# Altium PCB MCU_Board.PcbDoc
Units mm, origin at the board's own origin, x right, y up, seen from the top; angles counter-clockwise.
Board outline 100 x 100 mm, 2 copper layers (Top Layer, Bottom Layer); 25 components, 26 nets, 142 pads, 0 vias.
Unrouted connection lines stored in the file: 82.
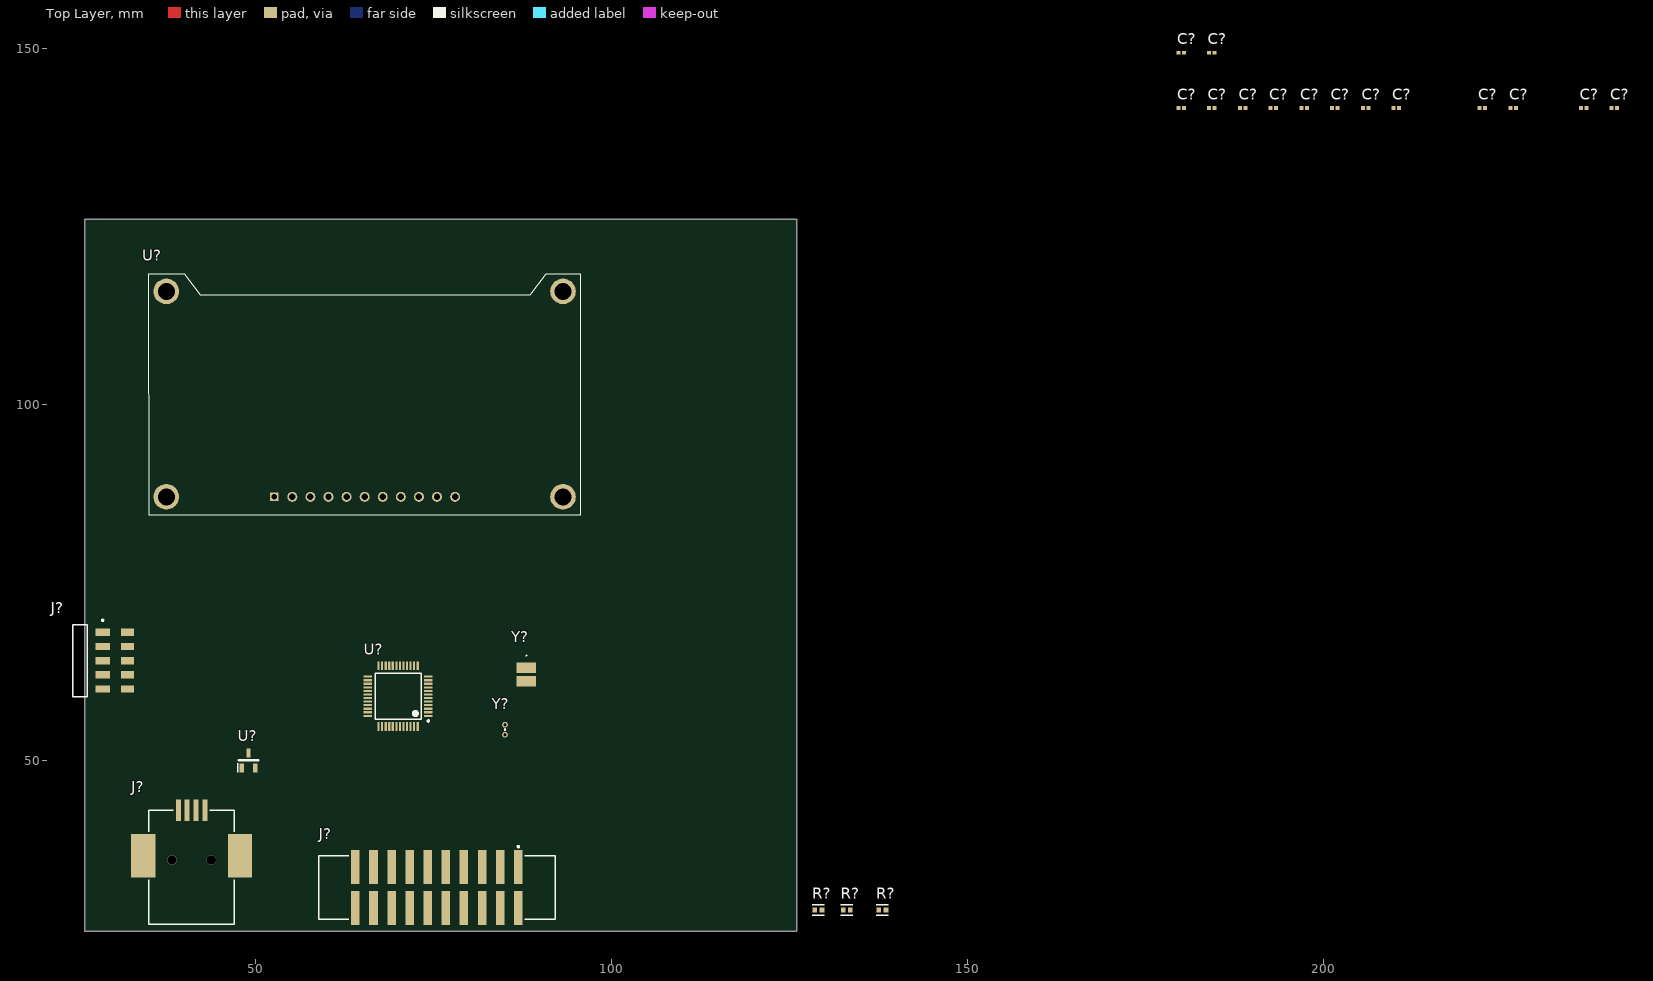
[diagram p0: Top Layer view]
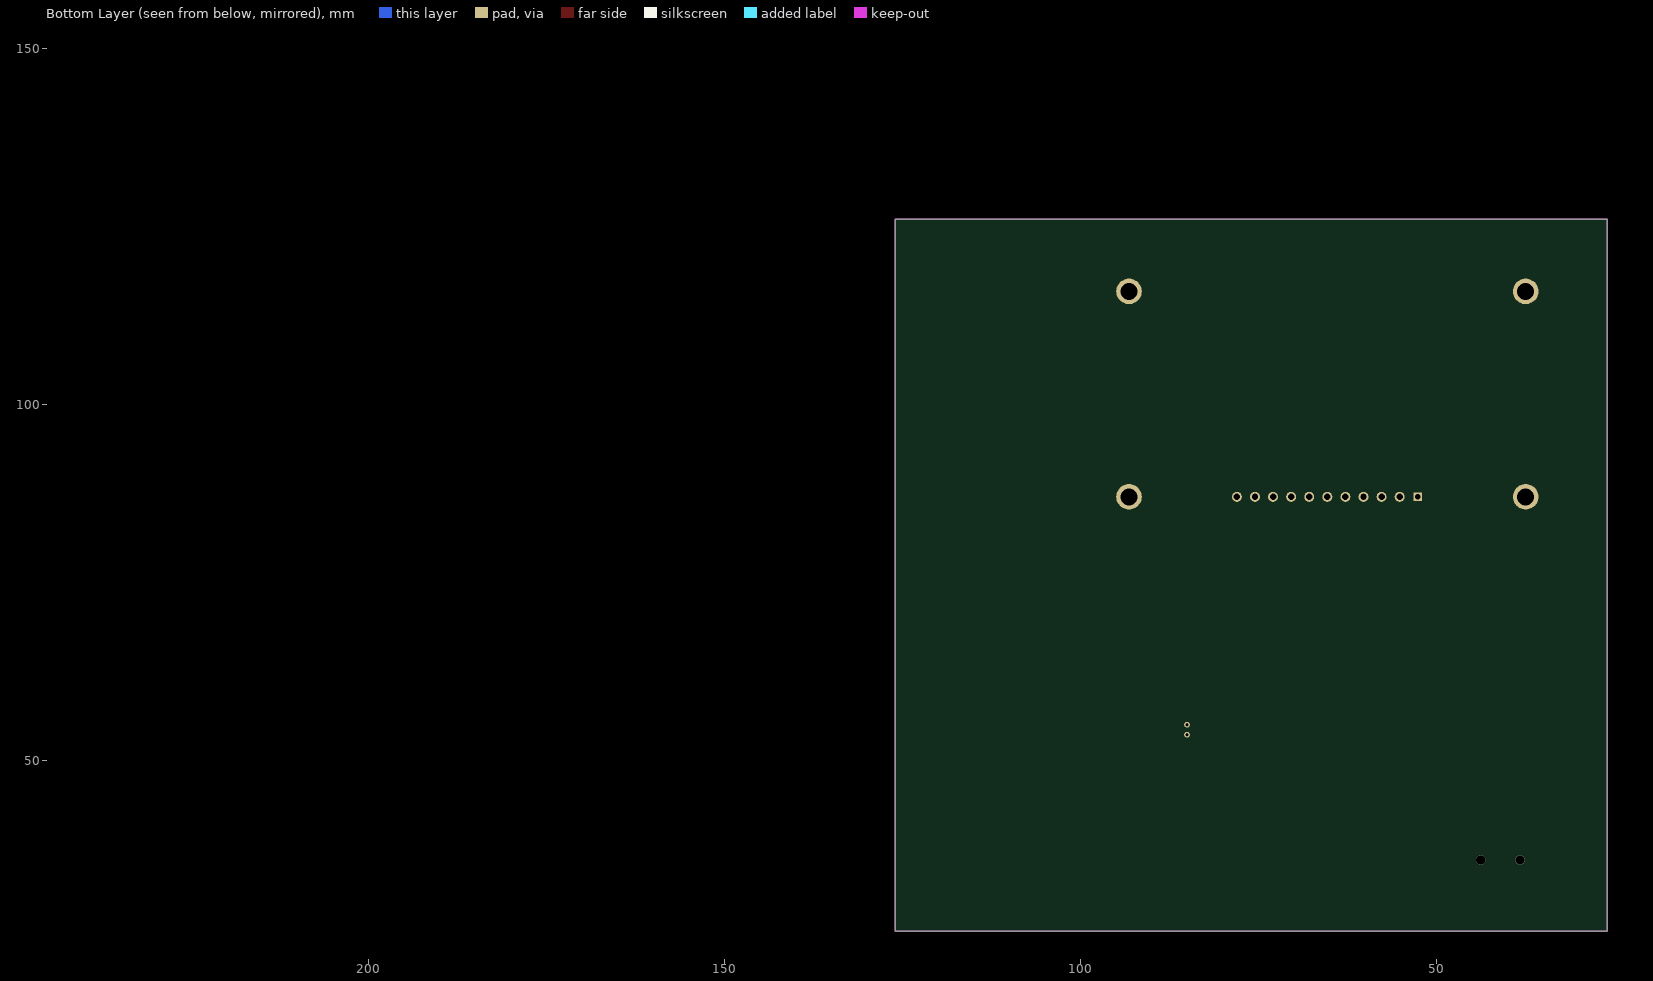
[diagram p1: Bottom Layer view, seen from below]

## Layer stack, top to bottom
Top Solder: solder mask 0.0102, Solder Resist, Dk 3.5
Top Layer: signal copper 0.0356
Dielectric 1: dielectric 0.32, FR-4, Dk 4.8
Bottom Layer: signal copper 0.0356
Bottom Solder: solder mask 0.0102, Solder Resist, Dk 3.5

## Board outline
26,26 126,26 126,126 26,126

## Design rules (kind name [scope] priority, off if disabled: settings)
Clearance [All] p1: gap=0.254 ignorepadtopadclearanceinfootprint=FALSE
DiffPairsRouting [All] p1: maxlimit=0.254 minlimit=0.254 mostfreqgap=0.254 toplayer_minwidth=0.381 toplayer_maxwidth=0.381 toplayer_prefwidth=0.381 bottomlayer_minwidth=0.381 bottomlayer_maxwidth=0.381 bottomlayer_prefwidth=0.381 maxuncoupledlength=12.7
PolygonConnect [All] p1: connectstyle=Relief reliefconductorwidth=0.254 reliefentries=4 polygonreliefangle="90 Angle" airgapwidth=0.254
RoutingVias [All] p1: holewidth=0.711 width=1.27 viastyle="Through Hole" minholewidth=0.711 minwidth=1.27 maxholewidth=0.711 maxwidth=1.27
SolderMaskExpansion [All] p1: expansion=0.102 istentingtop=FALSE
SupplyNets "Schematic Supply Nets_2" [InNet('GND')] p1: voltage=0.000
SupplyNets "Schematic Supply Nets_1" [InNet('VDD')] p2: voltage=0.000
SupplyNets "Schematic Supply Nets" [InNet('VDDA')] p3: voltage=0.000
Width [All] p1: maxlimit=0.254 minlimit=0.254 preferedwidth=0.254
29 further rules are at their usual default settings.

## Classes and differential pairs
component class PowerSupply: C? U?
component class MCU: C? U? Y?
component class LCD_Display: U?
component class Connectors: J? R?
differential pair USB: +USB_P -USB_N
differential pair OSC: +OSC_P -OSC_N
differential pair OSC32: +OSC32_P -OSC32_N

## Components (designator, comment, footprint, x,y, rotation, side; value= is the part's Value field where it differs from the comment)
C? "10uF" CAP_0402 197.231,141.605 r0 top
C? "100nF" CAP_0402 188.595,141.605 r0 top
C? "10nF" CAP_0402 205.867,141.605 r0 top
C? "10pF" CAP_0402 226.568,141.605 r0 top
C? "10pF" CAP_0402 240.792,141.605 r0 top
C? "100nF" CAP_0402 236.474,141.605 r0 top
C? "100nF" CAP_0402 192.913,141.605 r0 top
C? "100nF" CAP_0402 184.277,141.605 r0 top
C? "1uF" CAP_0402 179.959,149.352 r0 top
C? "1uF" CAP_0402 184.277,149.352 r0 top
C? "10uF" CAP_0402 201.549,141.605 r0 top
C? "20pF" CAP_0402 210.185,141.605 r0 top
C? "100nF" CAP_0402 179.959,141.605 r0 top
C? "20pF" CAP_0402 222.25,141.605 r0 top
J? "61232020621" 61232020621 75.43,32.125 r180 top
J? "2x5 Header" SMTC-MMT-105-01-X-DH 27,64 r270 top
J? "USB_B_connector" 62910416121 41,35 r0 top
R? "10k" Res_0402 138,29 r0 top
R? "10k" Res_0402 133,29 r0 top
R? "10k" Res_0402 129,29 r0 top
U? "NHD-0108HZ-FSW-GBW" NHD0108HZFSWGBW 52.6,87 r0 top
U? "STM32L433CCT6" FP-LQFP48-5B-MFG 70,59 r180 top
U? "LDO-Voltage-Regulator-3Pin" SOT95P237X112-3N 49,50 r90 top
Y? "NX3225GD-8MHZ-STD-CRA-3" NX3225GD8MHZSTDCRA3 88,62.05 r270 top
Y? "ECS-.320-12.5-13X" ECS32012513X 85,53.6 r90 top

## Footprints (in the part's own frame and the unit in brackets; to place one, negate y for a bottom-side part, rotate by r counter-clockwise, add the part's x,y. Pads: shape width x height; smd on the part's side, far side on the other; paste and mask are expansions set on the pad)
61232020621 [mm] "WR-BHD 2.54mm Male SMT Box Header (Reel), 20p"
  rect 1.2x4.75 smd: 1(-11.43,-2.875) 2(-11.43,2.875) 3(-8.89,-2.875) 4(-8.89,2.875) 5(-6.35,-2.875) 6(-6.35,2.875) 7(-3.81,-2.875) 8(-3.81,2.875) 9(-1.27,-2.875) 10(-1.27,2.875) 11(1.27,-2.875) 12(1.27,2.875) 13(3.81,-2.875) 14(3.81,2.875) 15(6.35,-2.875) 16(6.35,2.875) 17(8.89,-2.875) 18(8.89,2.875) 19(11.43,-2.875) 20(11.43,2.875)
  silkscreen extent -16.61,-5.87 16.61,4.47, body extent -16.51,-4.75 16.51,4.88, height 11.35
62910416121 [mm] "USB 2.0 Type B SMT Horizontal"
  rect 0.7x3 smd: 1(1.875,8) 2(-0.625,8) 3(-1.875,8) 4(0.625,8)
  round 1.3 hole 1.3 unplated: MH1(-2.75,1) MH2(2.75,1)
  rect 3.4x6.04 smd: Shell(-6.8,1.6) Shell(6.8,1.6)
  silkscreen extent -6.02,-8 6.02,8, body extent -8.1,-8 8.1,9.39, height 11.16
CAP_0402 [mm] "Chip Capacitor, 2-Leads, Body 1.00x0.50mm, IPC High Density"
  rect 0.56x0.52 smd: 1(-0.39,0) 2(0.39,0)
  body extent -0.53,-0.28 0.53,0.28, height 0.55
ECS32012513X [mm]
  round 0.8 hole 0.46: 1(0,0) 2(1.4,0)
  silkscreen extent 0.6,-0.1 0.8,0.1, body extent -0.34,-1.05 1.74,1.05, height 7.75
FP-LQFP48-5B-MFG [mm]
  rect 1.2x0.3 smd paste+0 mask+0: 1(-4.25,2.75) 2(-4.25,2.25) 3(-4.25,1.75) 4(-4.25,1.25) 5(-4.25,0.75) 6(-4.25,0.25) 7(-4.25,-0.25) 8(-4.25,-0.75) 9(-4.25,-1.25) 10(-4.25,-1.75) 11(-4.25,-2.25) 12(-4.25,-2.75) 25(4.25,-2.75) 26(4.25,-2.25) 27(4.25,-1.75) 28(4.25,-1.25) 29(4.25,-0.75) 30(4.25,-0.25) 31(4.25,0.25) 32(4.25,0.75) 33(4.25,1.25) 34(4.25,1.75) 35(4.25,2.25) 36(4.25,2.75)
  rect 0.3x1.2 smd paste+0 mask+0: 13(-2.75,-4.25) 14(-2.25,-4.25) 15(-1.75,-4.25) 16(-1.25,-4.25) 17(-0.75,-4.25) 18(-0.25,-4.25) 19(0.25,-4.25) 20(0.75,-4.25) 21(1.25,-4.25) 22(1.75,-4.25) 23(2.25,-4.25) 24(2.75,-4.25) 37(2.75,4.25) 38(2.25,4.25) 39(1.75,4.25) 40(1.25,4.25) 41(0.75,4.25) 42(0.25,4.25) 43(-0.25,4.25) 44(-0.75,4.25) 45(-1.25,4.25) 46(-1.75,4.25) 47(-2.25,4.25) 48(-2.75,4.25)
  silkscreen extent -4.38,-3.25 3.25,3.6, body extent -4.95,-4.95 4.95,4.95, height 0.25
NHD0108HZFSWGBW [mm]
  rect 1.2x1.2 hole 0.75: 1(0,0)
  round 1.4 hole 0.9: 2(2.54,0) 3(5.08,0) 4(7.62,0) 5(10.16,0) 6(12.7,0) 7(15.24,0) 8(17.78,0) 9(20.32,0) 10(22.86,0) 11(25.4,0)
  round 3.6 hole 2.4: MH1(-15.15,0) MH2(40.55,0) MH3(40.55,28.85) MH4(-15.15,28.85)
  silkscreen extent -17.71,-2.5 43.05,31.35, body extent -17.82,-2.43 42.88,31.43, height 7.72
NX3225GD8MHZSTDCRA3 [mm]
  rect 1.5x2.7 smd: 1(-0.95,0) 2(0.95,0)
  silkscreen extent -2.7,-0.05 -2.6,0.05, body extent -1.6,-1.25 1.6,1.25, height 1
Res_0402 [mm]
  rect 0.668x0.672 smd paste+0 mask+0: 1(-0.502,0) 2(0.502,0)
  silkscreen extent -0.84,-0.74 0.84,0.74, body extent -1.04,-0.54 1.04,0.54, height 0.25
SMTC-MMT-105-01-X-DH [mm] "Terminal Surface Mount Strip ASSEM, 2x5 Pins, Horizontal, 2mm Pitch, Male"
  rect 1.02x2.03 smd: 1(-4,1.491) 3(-2,1.491) 5(0,1.491) 7(2,1.491) 9(4,1.491)
  rect 1.02x1.78 smd: 2(-4,4.996) 4(-2,4.996) 6(0,4.996) 8(2,4.996) 10(4,4.996)
  silkscreen extent -5.77,-2.68 5.06,1.62, body extent -5,-5.88 5,5.54, height 3.92
SOT95P237X112-3N [mm]
  rect 1.25x0.6 smd: 1(-1.05,0.95) 2(-1.05,-0.95) 3(1.05,0)
  silkscreen extent -1.68,-1.46 0.08,1.5, body extent -1.27,-1.46 1.27,1.46, height 1

## Part data
C? C? C? C? C? C? C? C? C? C? C? C? C? C?: library part Capacitor, Manufacturer=Murata, Part Number=GRM155R71E103KA01D
J?: library part "2x10 JTAG", Color=Black, Contact Resistance=20mΩ, Current Rating=3A, Insulation Resistance=1GΩ, Max Operating Temperature=125°C, Min Operating Temperature=-40°C, Operating Supply Voltage=250V, Connector Type="Male Pin", Contact Material=Copper, Contact Mating Length=5.0038mm, Contact Plating=Gold, Gender=Male, Lead Pitch=2.54mm, Length=30.72mm, Mount="Surface Mount", NexarPartId=32855514, Number of Contacts=20, Number of Pins=20, Number of Positions=20, Number of Rows=2, Orientation=Vertical, Packaging="Tape and Reel", Pitch=2.54mm, REACH SVHC=Unknown, RoHS=Compliant, Row Spacing=2.54mm, Termination=Solder
J?: "Horizontal Surface Mount Header, -55 to 125 degC, 2 mm Pitch, 10-Pin, Male, RoHS", Manufacturer=Samtec, PartNumber=MMT-105-01-F-DH, Temperature Range="-55 to 125 degC", ComponentLink1Description="Manufacturer URL", ComponentLink1URL=http://www.samtec.com, ComponentLink2Description=Datasheet, ComponentLink2URL=http://d2a072wq521u33.cloudfront.net/catalog_english//MMT_SM.PDF, ComponentLink3Description="Package Specification", ComponentLink3URL=http://www.samtec.com/documents/webfiles/cpdf/MMT-1XX-XX-XX-XX-XX-XXX-X-XX-MKT.pdf, DatasheetVersion=F-214, Mounting Technology="Surface Mount", Orientation=Horizontal, PackageDescription="2mm Horizontal Terminal Surface Mount Strip ASSEM", PackageReference=MMT-105-01-X-DH, PackageVersion="CY, 12/2000", Pitch="2 mm", RoHS=True
J?: Contact Resistance=20mΩ, Current Rating=1.5A, Insulation Resistance=1GΩ, Max Operating Temperature=105°C, Min Operating Temperature=-40°C, Operating Supply Voltage=30V, Connector Type=USB, Contact Plating=Gold, Features=Shielded, Gender=Receptacle, Lead Free="Lead Free", Length=16mm, Mount="Horizontal, Surface Mount", NexarPartId=19991172, Number of Contacts=4, Number of Pins=4, Orientation=Horizontal, Packaging="Tape and Reel", REACH SVHC=Unknown, RoHS=Compliant, Termination=SMD/SMT, USB Standard="USB 2.0"
R? R? R?: library part Resistor_EU
U?: "Display", Manufacturer_Name="Newhaven Display", Mouser Part Number=763-0108HZ-FSW-GBW, Datasheet Link=https://componentsearchengine.com/Datasheets/1/NHD-0108HZ-FSW-GBW.pdf, Height=6.25mm, Manufacturer_Part_Number=NHD-0108HZ-FSW-GBW, Mouser Price/Stock=https://www.mouser.co.uk/ProductDetail/Newhaven-Display/NHD-0108HZ-FSW-GBW?qs=3vk7fz9CmNzWmNqjoshRyQ%3D%3D
U?: "IC MCU 32BIT 256KB FLASH 48LQFP", Ambient Temperature Range High=+85°C, Ambient Temperature Range Low=-40°C, Frequency=80MHz, Manufacturer=STMicroelectronics, Max Junction Temp=+105°C, Max Supply Voltage=3.6V, Min Supply Voltage=1.55V, Package=LQFP48-5B, Temperature="-40°C to +85°C", Automotive=No, Category=IC, ComponentLink2Description=Datasheet, ComponentLink2URL=https://www.st.com/resource/en/datasheet/stm32l433cc.pdf, Core Architecture="Arm Cortex-M4", Data Bus Width=32bits, Device Class L1="Integrated Circuits (ICs)", Device Class L2="Embedded Processors and Controllers", Device Class L3=Microcontrollers, Digikey Description="IC MCU 32BIT 256KB FLASH 48LQFP", Height=1.6mm, Interface=I2C,SPI,UART,USART,CAN,USB,LIN,IrDA,SMBus,Other, Ipc Land Pattern Name=QFP50P900X900X160-48, Lead Free=Yes, Manufacturer Part Number=STM32L433CCT6, Memory Size=256KBytes, Memory Type=FLASH, Number Of A/D Converters=1, Number Of Adc Channels=10, Number Of Cores=1, Number Of I2C Channels=3, Number Of I/Os=38, Number Of Pwm Channels=14, Number Of Spi Channels=3, Number Of Timers/Counters=9, Number Of Uart Channels=4, Number Of Usb Channels=1, Octopart=https://octopart.com/stm32l433cct6-stmicroelectronics-71093511, Ram Size=64KBytes, RoHS=TRUE, Standoff Height=0.05mm, Temperature Range High=+85°C, Temperature Range Low=-40°C
Y?: "Crystal or Oscillator", Manufacturer_Name=NDK, Mouser Part Number=344-NX3225GD8MCRA3, Datasheet Link=https://th.mouser.com/datasheet/2/905/c_NX3225GD-STD-CRA-3_e-1317534.pdf, Height=1mm, Manufacturer_Part_Number=NX3225GD-8MHZ-STD-CRA-3, Mouser Price/Stock=https://www.mouser.co.uk/ProductDetail/NDK/NX3225GD-8MHZ-STD-CRA-3?qs=55YtniHzbhDA0fw3anYH2g%3D%3D
Y?: "Crystal or Oscillator", Manufacturer_Name=ECS, Mouser Part Number=520-ECS-32-12.5-13X, Arrow Part Number=ECS-.320-12.5-13X, Arrow Price/Stock=https://www.arrow.com/en/products/ecs-.320-12.5-13x/ecs-international?region=nac, Datasheet Link=https://g.componentsearchengine.com/Datasheets/1/ECS-.320-12.5-13X.pdf, Height=6.2mm, Manufacturer_Part_Number=ECS-.320-12.5-13X, Mouser Price/Stock=https://www.mouser.co.uk/ProductDetail/ECS/ECS-.320-12.5-13X?qs=aGohqJksTCKD9WVp6G%2FEsQ%3D%3D

## Nets (pads, with @x,y where several pads share a name; then routed paths per layer and width w, separated by ;. In a path a pad name is that pad's centre, name@x,y a point inside that pad or via, vN(x,y) a via of type N, cw(c..) or ccw(c..) an arc to the next point about the centre after c; other vN are vias at no path point)
BOOT: U?.44
GND: C?.1@179.569,141.605 C?.1@179.569,149.352 C?.1@183.887,141.605 C?.1@183.887,149.352 C?.1@188.205,141.605 C?.1@192.523,141.605 C?.1@196.841,141.605 C?.1@201.159,141.605 C?.1@205.477,141.605 C?.1@236.084,141.605 C?.2@210.575,141.605 C?.2@222.64,141.605 C?.2@226.958,141.605 C?.2@241.182,141.605 J?.4@41.625,43 J?.4@84.32,29.25 J?.6@81.78,29.25 J?.8@79.24,29.25 J?.10@76.7,29.25 J?.12 J?.14 J?.16 J?.18 J?.20 J?.Shell R?.1 U?.1@48.05,48.95 U?.1@52.6,87 U?.8@74.25,59.75 U?.11@78,87 U?.23 U?.35 U?.47 U?.MH1 U?.MH2 U?.MH3 U?.MH4
NetC?_2: C?.2@180.349,149.352 J?.1@42.875,43 U?.3@49,51.05
NetJ?_3: J?.3@84.32,35 U?.40
NetJ?_5: J?.5@81.78,35 U?.38
NetJ?_7: J?.7@79.24,35 U?.34
NetJ?_9: J?.9@76.7,35 U?.37
NetJ?_11: J?.11 R?.2@129.502,29
NetJ?_13: J?.13 U?.39
NetJ?_17: J?.17 R?.2@133.502,29
NetJ?_19: J?.19 R?.2@138.502,29
NetU?_3: U?.3@57.68,87 U?.19
NetU?_4: U?.4@60.22,87 U?.18
NetU?_5: U?.5@62.76,87 U?.17
NetU?_6: U?.6@65.3,87 U?.16
NetU?_7: U?.7@67.84,87 U?.15
NetU?_8: U?.8@70.38,87 U?.14
NetU?_9: U?.9@72.92,87 U?.13
OSC32_N: C?.1@226.178,141.605 U?.4@74.25,57.75 Y?.2@85,55
OSC32_P: C?.1@240.402,141.605 U?.3@74.25,57.25 Y?.1@85,53.6
OSC_N: C?.1@209.795,141.605 U?.6@74.25,58.75 Y?.1@88,63
OSC_P: C?.1@221.86,141.605 U?.5@74.25,58.25 Y?.2@88,61.1
USB_N: J?.2@40.375,43 U?.32
USB_P: J?.3@39.125,43 U?.33
VDD: C?.2@180.349,141.605 C?.2@184.667,141.605 C?.2@184.667,149.352 C?.2@188.985,141.605 C?.2@193.303,141.605 C?.2@197.621,141.605 J?.1@86.86,35 J?.2@86.86,29.25 U?.1@74.25,56.25 U?.2@49.95,48.95 U?.2@55.14,87 U?.10@75.46,87 U?.24 U?.36 U?.48
VDDA: C?.2@201.939,141.605 C?.2@206.257,141.605 U?.9@74.25,60.25
pads on no net: C?.2@236.864,141.605 J?.1@28.491,68 J?.2@31.996,68 J?.3@28.491,66 J?.4@31.996,66 J?.5@28.491,64 J?.6@31.996,64 J?.7@28.491,62 J?.8@31.996,62 J?.9@28.491,60 J?.10@31.996,60 J?.15 J?.MH1 J?.MH2 U?.2@74.25,56.75 U?.7@74.25,59.25 U?.10@74.25,60.75 U?.11@74.25,61.25 U?.12 U?.20 U?.21 U?.22 U?.25 U?.26 U?.27 U?.28 U?.29 U?.30 U?.31 U?.41 U?.42 U?.43 U?.45 U?.46

## Keep-outs
Keep-Out Layer:
  the board outline again, w0.1